# EAGLE board HW2_latest_v2 (EAGLE 7.5.0)
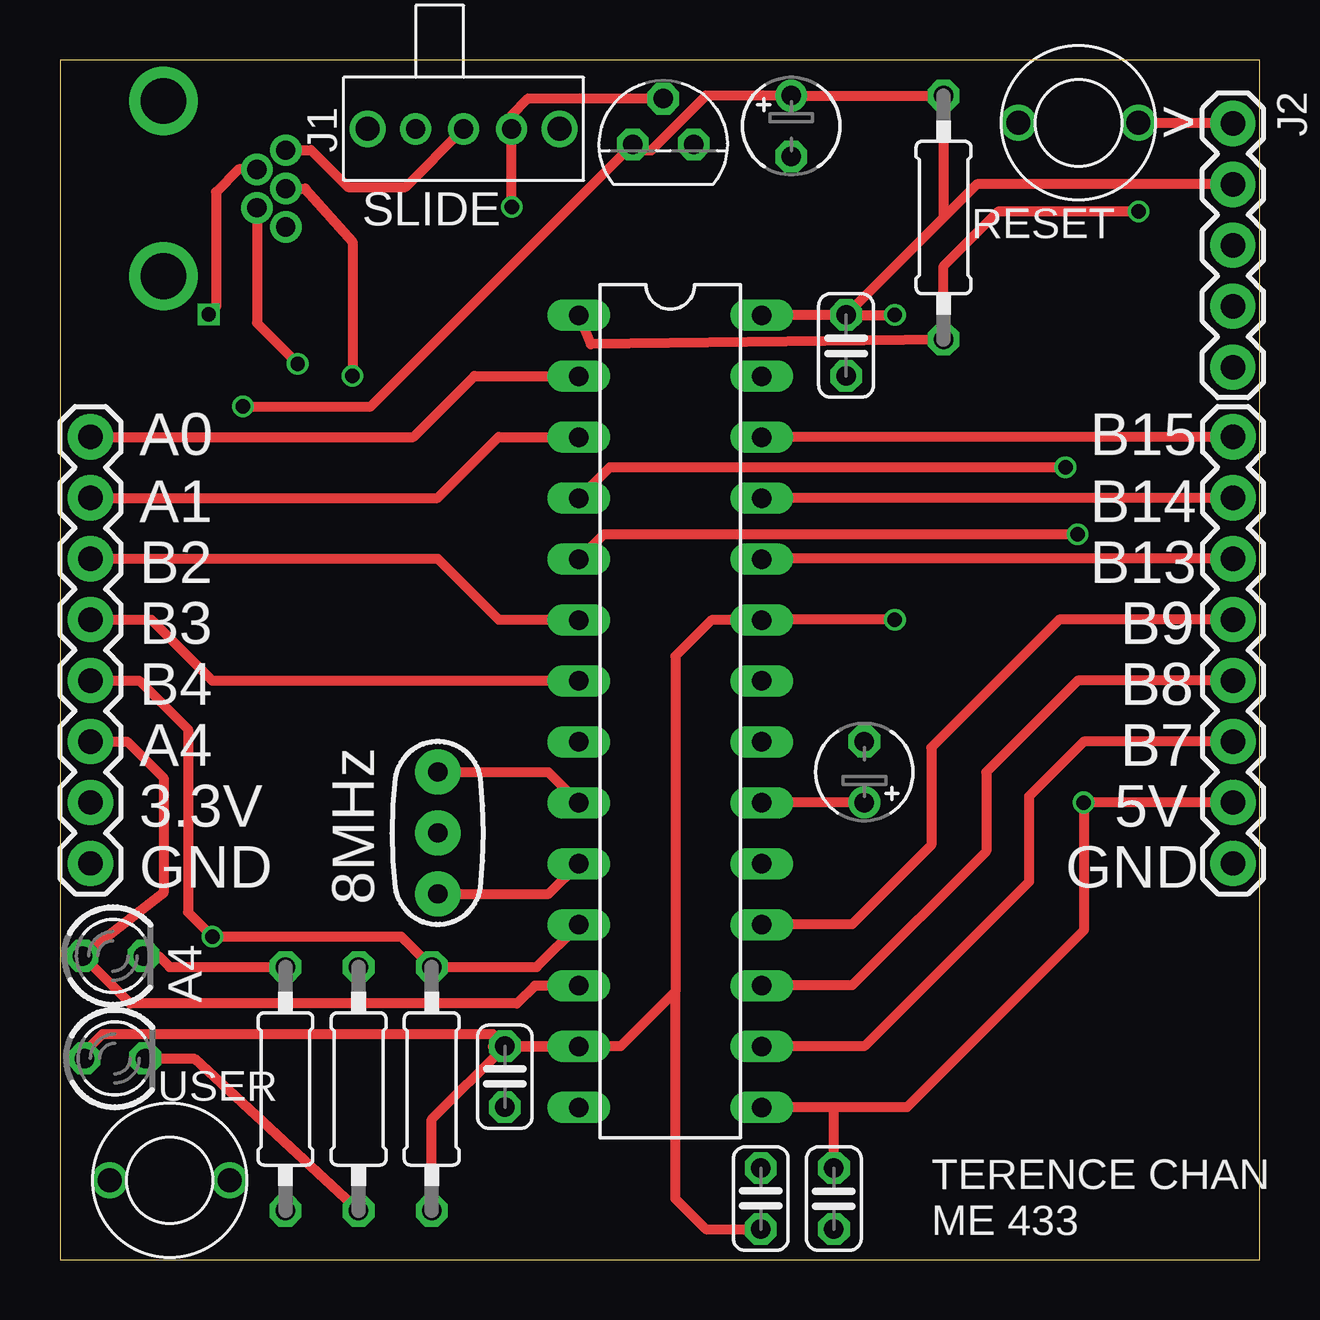
[diagram p0: board, top side]
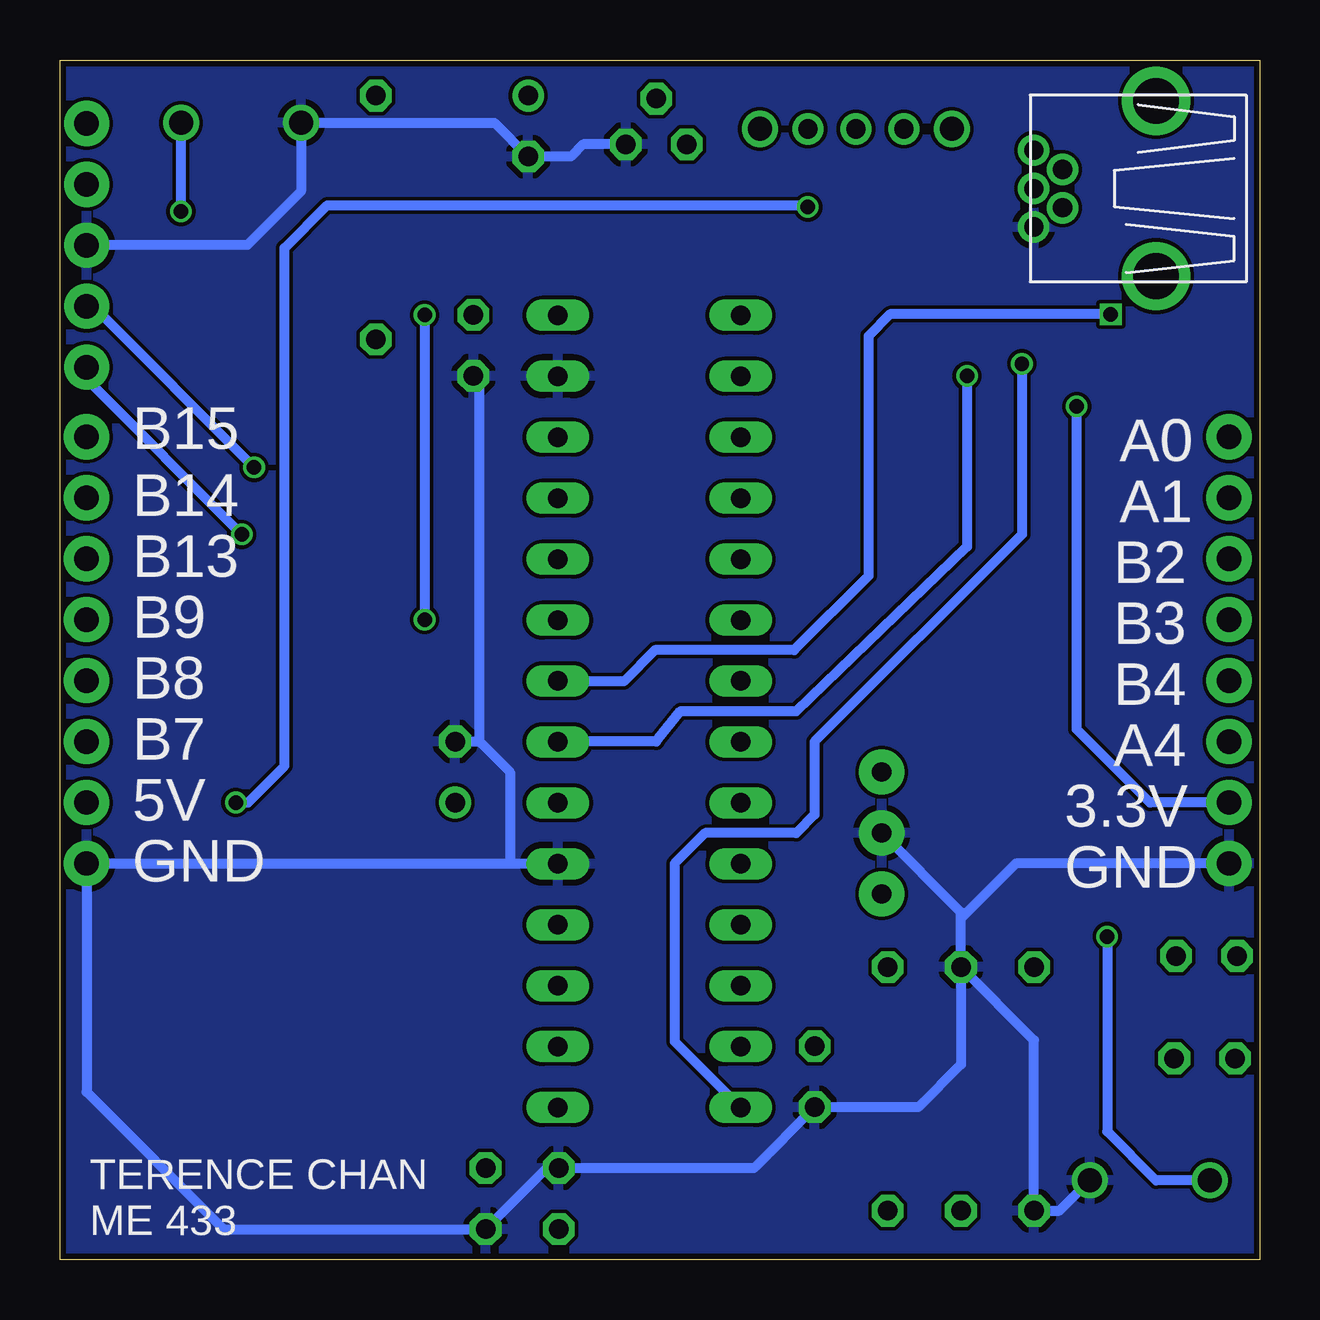
[diagram p1: board, bottom side, seen from below]

Size 50 x 50 mm. Coordinates in mm from the lower left corner, seen from the top.
Outline: 0,0 50,0 50,50 0,50 0,0
Copper layers (1*16): Top 0.035mm / dielectric 1.5mm / Bottom 0.035mm
Design rules "SeeedStudio_2layer_DRU_no_angle_20140221": minimum track width 6mil, minimum drill 12mil, track to track 6mil, track to pad 6mil, pad to pad 6mil, via to via 6mil, smd to smd 0mil, copper to edge 10mil, drill to drill 10mil, minimum pad ring 10mil, minimum via ring 6mil, stop-mask expansion 2mil, vias tented up to drill 100mil, thermal gap 10mil

## Footprints (pad centres in the part's own frame; a part is rotated, then mirrored left to right if it is on the bottom)
C025-024X044 = drill 0.813 octagon: 1 -1.27,0; 2 1.27,0
TT2D4 = drill 0.813: + -1.27,0 | drill 0.813 octagon: - 1.27,0
USB-MB-H = drill 0.8: D+ 5.1,0; D- 3.9,0.8; GND 5.1,-1.6; ID 3.9,-0.8; VBUS 5.1,1.6 | drill 1.9: P$6 0,-3.65; P$7 0,3.65
1X05 = drill 1.016 pad 1.88: 1 0,0; 2 2.54,0; 3 5.08,0; 4 7.62,0; 5 10.16,0
LED3MM = drill 0.813 octagon: A -1.27,0; K 1.27,0
1X08_ROUND = drill 1.016 pad 1.88: 1 0,0; 2 2.54,0; 3 5.08,0; 4 7.62,0; 5 10.16,0; 6 12.7,0; 7 15.24,0; 8 17.78,0
0207/10 = drill 0.813 octagon: 1 -5.08,0; 2 5.08,0
PUSH_BUTTON = drill 1: 1.A -2.5,0; 2.B 2.5,0
DIL28-3 = drill 0.813 long: 1 -16.51,-3.81; 2 -13.97,-3.81; 3 -11.43,-3.81; 4 -8.89,-3.81; 5 -6.35,-3.81; 6 -3.81,-3.81; 7 -1.27,-3.81; 8 1.27,-3.81; 9 3.81,-3.81; 10 6.35,-3.81; 11 8.89,-3.81; 12 11.43,-3.81; 13 13.97,-3.81; 14 16.51,-3.81; 15 16.51,3.81; 16 13.97,3.81; 17 11.43,3.81; 18 8.89,3.81; 19 6.35,3.81; 20 3.81,3.81; 21 1.27,3.81; 22 -1.27,3.81; 23 -3.81,3.81; 24 -6.35,3.81; 25 -8.89,3.81; 26 -11.43,3.81; 27 -13.97,3.81; 28 -16.51,3.81
TO92 = drill 0.813 octagon: 1 1.27,0; 2 0,1.905; 3 -1.27,0
SLIDE_SWITCH = drill 0.8: 1.VIN 0,0; 2.OUT2 2,0; 3.OUT2 -2,0 | drill 1: 4.X -4,0; 5.X 4,0
RESONATOR-PTH = drill 0.8 pad 1.88: 1 -2.54,0; 2 0,0; 3 2.54,0

## Placement (x,y rotation side)
C1  1uF  [C025-024X044]  32.26,2.54 270 top
C3  0.1uF  [C025-024X044]  18.54,7.62 90 top
C4  10uF  [TT2D4]  30.48,47.24 270 top
C5  1uF  [C025-024X044]  29.21,2.54 90 top
C6  0.1uF  [C025-024X044]  32.77,38.1 270 top
C7  10uF  [TT2D4]  33.53,20.32 90 top
J1  USB-MB-H  [USB-MB-H]  4.31,44.64 0 top
J2  [1X05]  48.89,47.35 270 top
LED1  [LED3MM]  2.21,12.65 0 top
LED2  [LED3MM]  2.29,8.38 0 top
M08_1  [1X08_ROUND]  1.27,16.51 90 top
M08_2  [1X08_ROUND]  48.9,16.51 90 top
R1  330  [0207/10]  12.45,7.11 270 top
R2  330  [0207/10]  9.4,7.11 90 top
R3  10k  [0207/10]  36.83,43.43 270 top
R5  10k  [0207/10]  15.49,7.11 270 top
RESET  PUSH_BUTTON  [PUSH_BUTTON]  42.45,47.38 180 top
U$1  PIC32MX250F128B  [DIL28-3]  25.44,22.85 270 top
U$2  MCP1702  [TO92]  25.15,46.48 0 top
U$3  SLIDE_SWITCH  [SLIDE_SWITCH]  16.82,47.13 180 top
USER  PUSH_BUTTON  [PUSH_BUTTON]  4.57,3.3 0 top
Y1  [RESONATOR-PTH]  15.75,17.78 270 top

## Library data of the parts
C1 C3-C7 J1 J2 LED1 LED2 R1-R3 R5 RESET U$1-U$3 USER Y1 = PIC32
M08_1 M08_2 = PIC32; PROD_ID: CONN-08437

## Nets
+3V3: C3.2 C4.+ C5.1 C6.1 J2.2 LED2.A M08_1.2 R3.1 R5.2 U$1.13 U$1.23 U$1.28 U$2.3
+5V: C1.1 M08_2.2 U$1.15 U$2.2 U$3.3.OUT2
A0: M08_1.8 U$1.2
A1: M08_1.7 U$1.3
A4: LED1.A M08_1.3 U$1.12
B0: J2.4 U$1.4
B1: J2.5 U$1.5
B2: M08_1.6 U$1.6
B3: M08_1.5 U$1.7
B4: M08_1.4 R5.1 U$1.11 USER.1.A
B5: J1.ID U$1.14
B7: M08_2.3 U$1.16
B8: M08_2.4 U$1.17
B9: M08_2.5 U$1.18
B13: M08_2.6 U$1.24
B14: M08_2.7 U$1.25
B15: M08_2.8 U$1.26
D+: J1.D+ U$1.21
D-: J1.D- U$1.22
GND: C1.2 C3.1 C4.- C5.2 C6.2 C7.- J1.GND J2.3 M08_1.1 M08_2.1 R1.1 R2.1 RESET.2.B U$1.19 U$1.27 U$2.1 USER.2.B Y1.2
MCLR: J2.1 R3.2 RESET.1.A U$1.1
N$1: LED1.K R2.2
N$2: LED2.K R1.2
N$3: J1.VBUS U$3.1.VIN
N$4: C7.+ U$1.20
OSC1: U$1.9 Y1.1
OSC2: U$1.10 Y1.3

## Tracks (layer width: path | path; a pad name or v marks a point on that pad's centre or on a via)
+3V3  (via drill 0.6)
  Top 0.406: 25.65,11.18 25.65,25.15 27.16,26.66 U$1.23 29.26,26.67 v34.8,26.67 | 25.65,11.18 23.37,8.89 21.64,8.89 U$1.13 | U$1.13 18.05,8.88 | 25.65,11.18 25.65,2.54 26.92,1.27 C5.1 | C3.2 21.62,8.89 U$1.13 | LED2.A 1.02,8.64 1.78,9.4 18.03,9.4 C3.2 | R5.2 15.49,5.84 C3.2 | J2.2 38.21,44.81 36.83,43.43 | 36.83,43.43 C6.1 | 36.83,43.43 R3.1 C4.+ 26.92,48.51 24.64,46.23 24.13,46.23 U$2.3 12.95,35.56 v7.62,35.56 | C6.1 v34.8,39.37 | C6.1 29.26,39.37 U$1.28
  Bottom 0.406: M08_1.2 4.57,19.05 7.62,22.1 v7.62,35.56 | v34.8,39.37 v34.8,26.67
+5V  (via drill 0.6)
  Top 0.406: M08_2.2 v42.67,19.05 42.67,13.72 35.31,6.35 32.26,6.35 | 32.26,6.35 29.26,6.35 U$1.15 | C1.1 32.26,6.35 | v18.83,43.87 U$3.3.OUT2 18.82,47.7 19.52,48.4 25.13,48.4 U$2.2
  Bottom 0.406: v42.67,19.05 42.16,19.05 40.64,20.57 40.64,42.16 38.86,43.94 | 38.86,43.94 18.9,43.94 | 18.9,43.94 v18.83,43.87 | 38.86,43.94 18.9,43.94
A0
  Top 0.406: M08_1.8 14.73,34.29 17.27,36.83 21.62,36.83 U$1.2
A1
  Top 0.406: M08_1.7 15.75,31.75 18.29,34.29 21.62,34.29 U$1.3
A4
  Top 0.406: M08_1.3 2.79,21.59 4.32,20.07 4.32,15.27 LED1.A 2.92,10.67 19.05,10.67 19.8,11.42 U$1.12
B0  (via drill 0.6)
  Top 0.406: v41.91,33.02 22.91,33.02 U$1.4
  Bottom 0.406: J2.4 48.62,39.73 v41.91,33.02
B1  (via drill 0.6)
  Top 0.406: v42.42,30.23 22.66,30.23 U$1.5
  Bottom 0.406: J2.5 48.89,36.7 v42.42,30.23
B2
  Top 0.406: M08_1.6 15.75,29.21 18.29,26.67 21.62,26.67 U$1.6
B3
  Top 0.406: M08_1.5 3.81,26.67 6.35,24.13 21.62,24.13 U$1.7
B4  (via drill 0.6)
  Top 0.406: M08_1.4 3.3,24.13 5.33,22.1 5.33,14.48 v6.35,13.46 14.22,13.46 R5.1 19.87,12.19 U$1.11
  Bottom 0.406: USER.1.A 4.32,3.3 6.35,5.33 v6.35,13.46
B5  (via drill 0.6)
  Top 0.406: J1.ID 8.21,39.03 v9.91,37.34
  Bottom 0.406: v9.91,37.34 9.91,30.23 18.54,21.59 18.54,18.54 19.3,17.78 23.11,17.78 24.38,16.51 24.38,9.09 U$1.14
B7
  Top 0.406: M08_2.3 42.67,21.59 40.39,19.3 40.39,15.75 33.53,8.89 29.26,8.89 U$1.16
B8
  Top 0.406: M08_2.4 42.42,24.13 38.61,20.32 38.61,17.02 33.02,11.43 29.26,11.43 U$1.17
B9
  Top 0.406: M08_2.5 41.66,26.67 36.32,21.34 36.32,17.27 33.02,13.97 29.26,13.97 U$1.18
B13
  Top 0.406: M08_2.6 U$1.24
B14
  Top 0.406: 49.53,31.75 M08_2.7 U$1.25
B15
  Top 0.406: M08_2.8 U$1.26
D+  (via drill 0.6)
  Top 0.406: J1.D+ 10.22,44.64 12.19,42.42 v12.19,36.83
  Bottom 0.406: U$1.21 29.24,21.59 25.15,21.59 24.13,22.86 19.3,22.86 12.19,29.72 v12.19,36.83
D-  (via drill 0.6)
  Top 0.406: J1.D- 7.44,45.44 6.5,44.5 6.5,39.7 v6.2,39.4
  Bottom 0.406: v6.2,39.4 15.4,39.4 16.3,38.5 16.3,28.5 19.4,25.4 25.2,25.4 26.5,24.1 29.23,24.1 U$1.22
GND
  Bottom 0.406: U$1.19 31.24,16.5 | 31.24,16.5 48.88,16.5 M08_2.1 48.9,6.99 43.18,1.27 C1.2 29.72,3.81 C5.2 21.08,3.81 C3.1 14.22,6.35 12.45,8.13 R1.1 | C7.- 32.51,21.59 | 32.51,21.59 31.24,20.32 31.24,16.5 | 32.51,21.59 32.51,36.58 C6.2 | USER.2.B 8.34,2.03 R2.1 9.4,9.14 R1.1 | R1.1 12.45,14.22 | 12.45,14.22 12.45,14.48 Y1.2 | M08_1.1 10.16,16.51 12.45,14.22 | J2.3 48.87,42.29 42.19,42.29 39.95,44.53 RESET.2.B 31.89,47.38 C4.- 28.7,45.97 28.19,46.48 U$2.1
  pour Bottom: -1.27,51.56 53.09,51.56 53.09,-5.08 -1.27,-5.08
MCLR  (via drill 0.6)
  Top 0.406: RESET.1.A 48.86,47.38 J2.1 | U$1.1 22.13,38.15 R3.2 36.83,41.4 39.12,43.69 v44.96,43.69
  Bottom 0.406: v44.96,43.69 RESET.1.A
N$1
  Top 0.406: LED1.K 4.11,12.65 4.57,12.19 R2.2
N$2
  Top 0.406: LED2.K 5.59,8.38 R1.2
N$3
  Top 0.406: J1.VBUS 10.46,46.24 12,44.7 14.4,44.7 U$3.1.VIN
N$4
  Top 0.406: C7.+ 29.26,19.05 U$1.20
OSC1
  Top 0.406: Y1.1 20.35,20.32 U$1.9
OSC2
  Top 0.406: Y1.3 20.37,15.24 U$1.10

## Text on the board
tPlace: > | SLIDE | A0 | B15 | A1 | B14 | B2 | B13 | B3 | B9 | B9 | B4 | B8 | B8 | A4 | B7 | B7 | 3.3V | 5V | GND | 8MHz | GND | A4 | TERENCE CHAN / ME 433
bPlace: B15 | A0 | A1 | B14 | B2 | B13 | B3 | B9 | B4 | B8 | A4 | B7 | 3.3V | 5V | GND | GND | TERENCE CHAN / ME 433